# Altium PCB PCB_配电变压器智能监测系统_2022-01-25.pcbdoc (part 1 of 2)
Units mil, origin at the board's own origin, x right, y up, seen from the top; angles counter-clockwise.
Board outline 10255 x 6268.94 mil, 2 copper layers (Top Layer, Bottom Layer); 221 components, 191 nets, 862 pads, 208 vias.
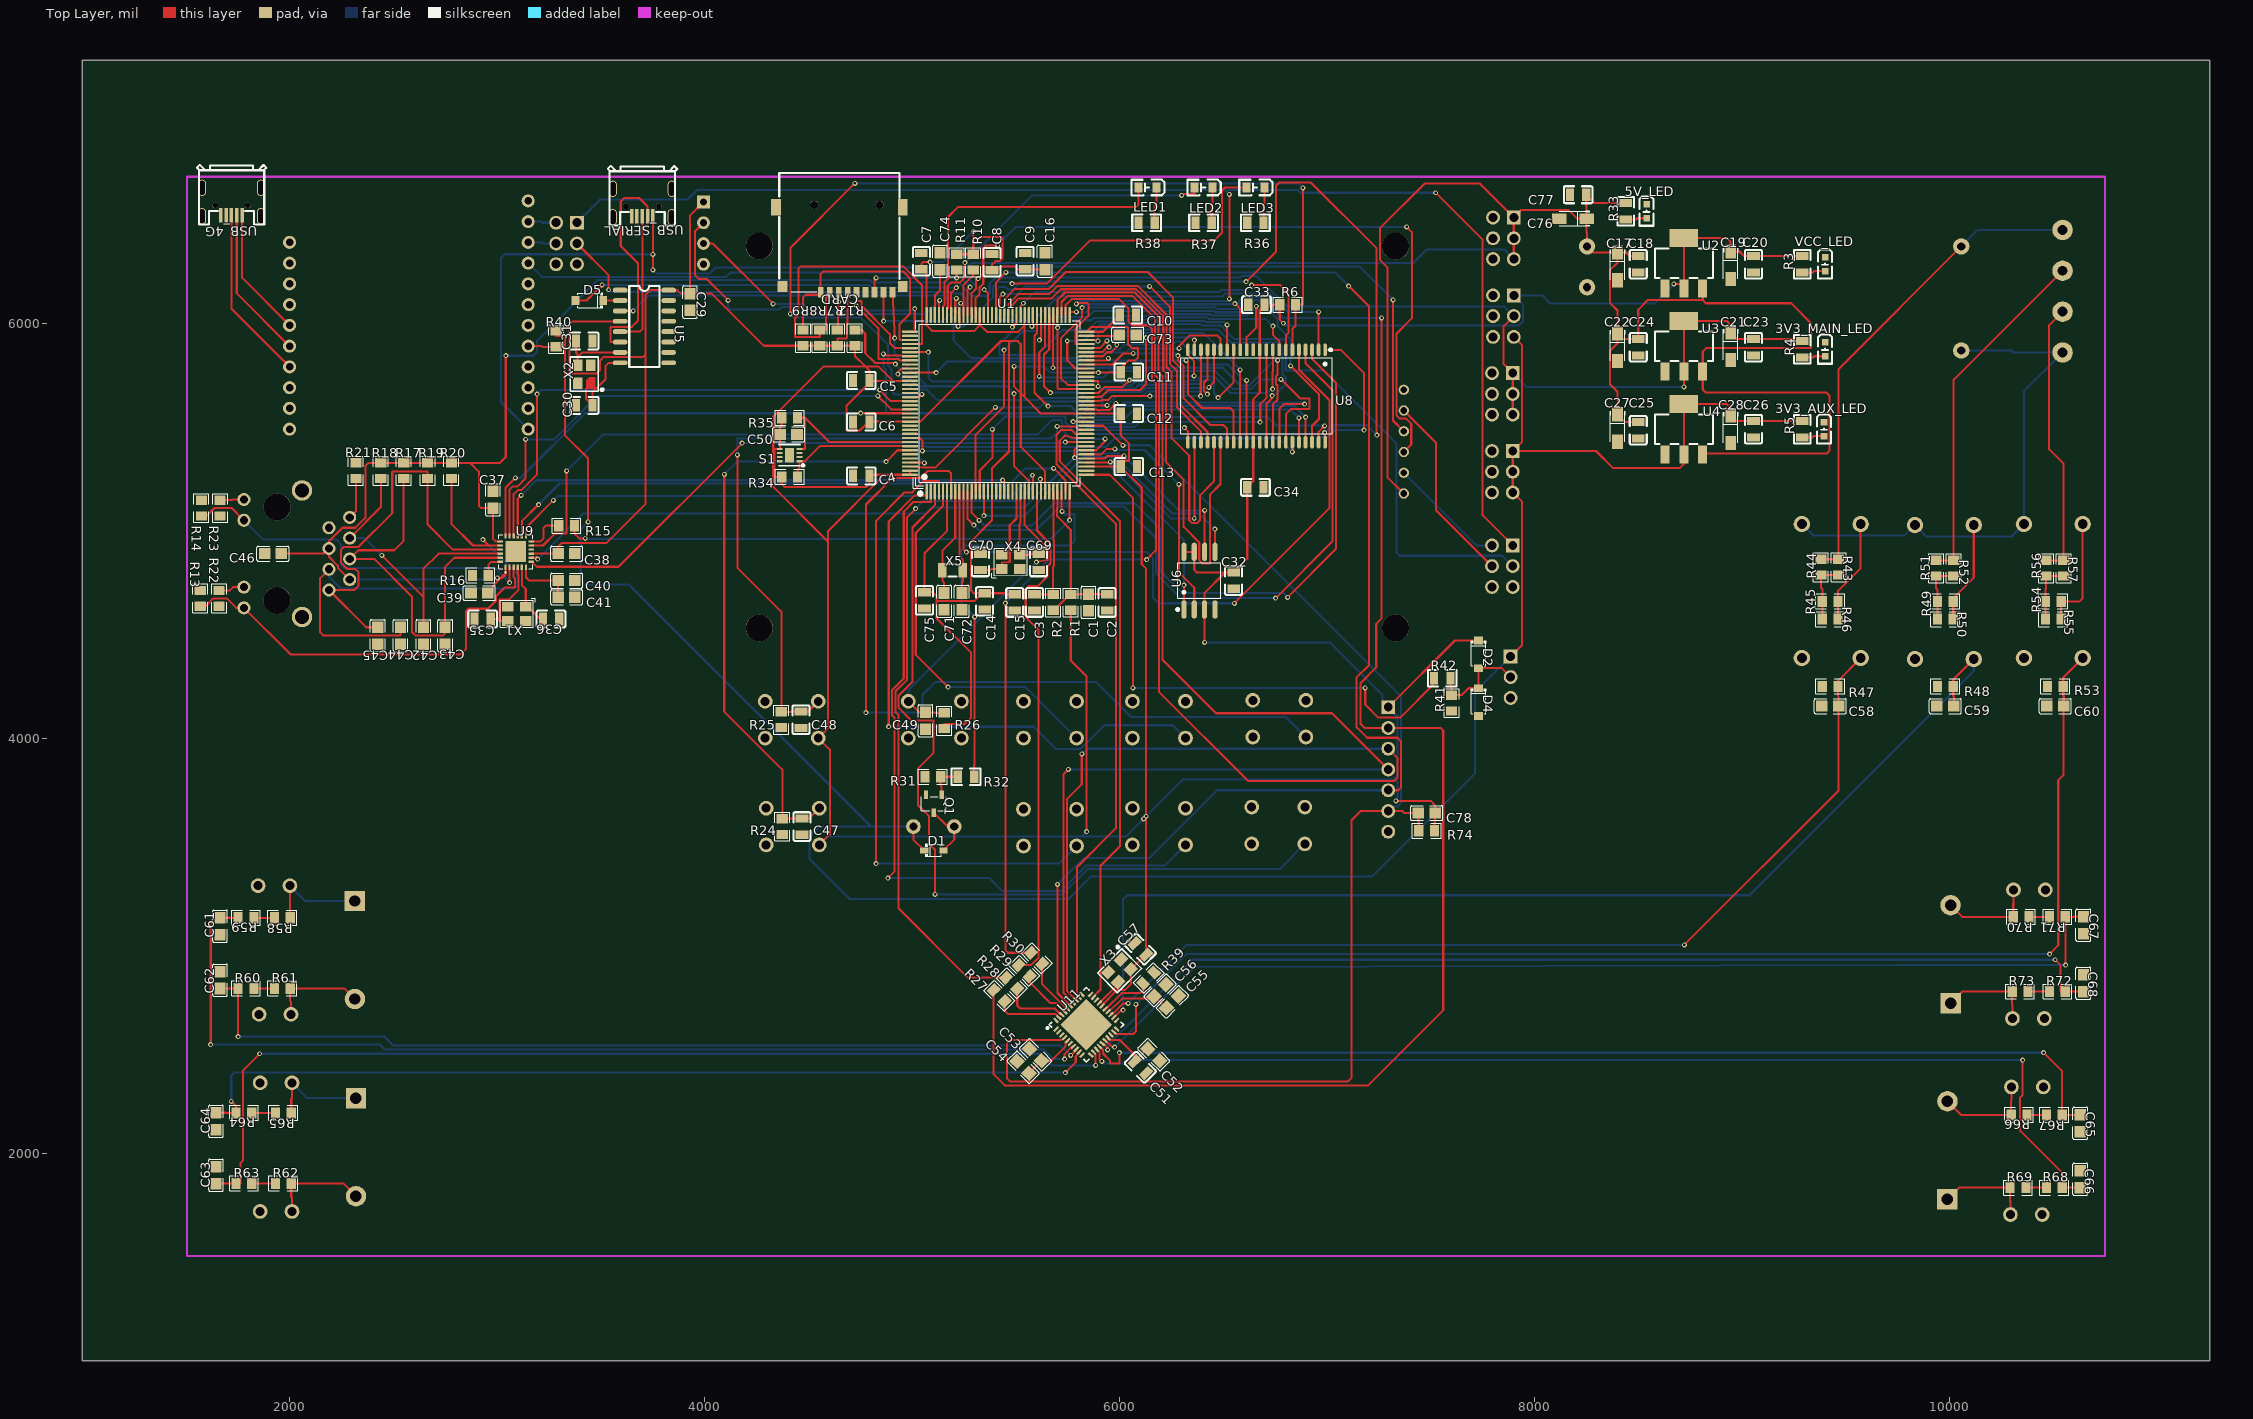
[diagram p0: Top Layer view]
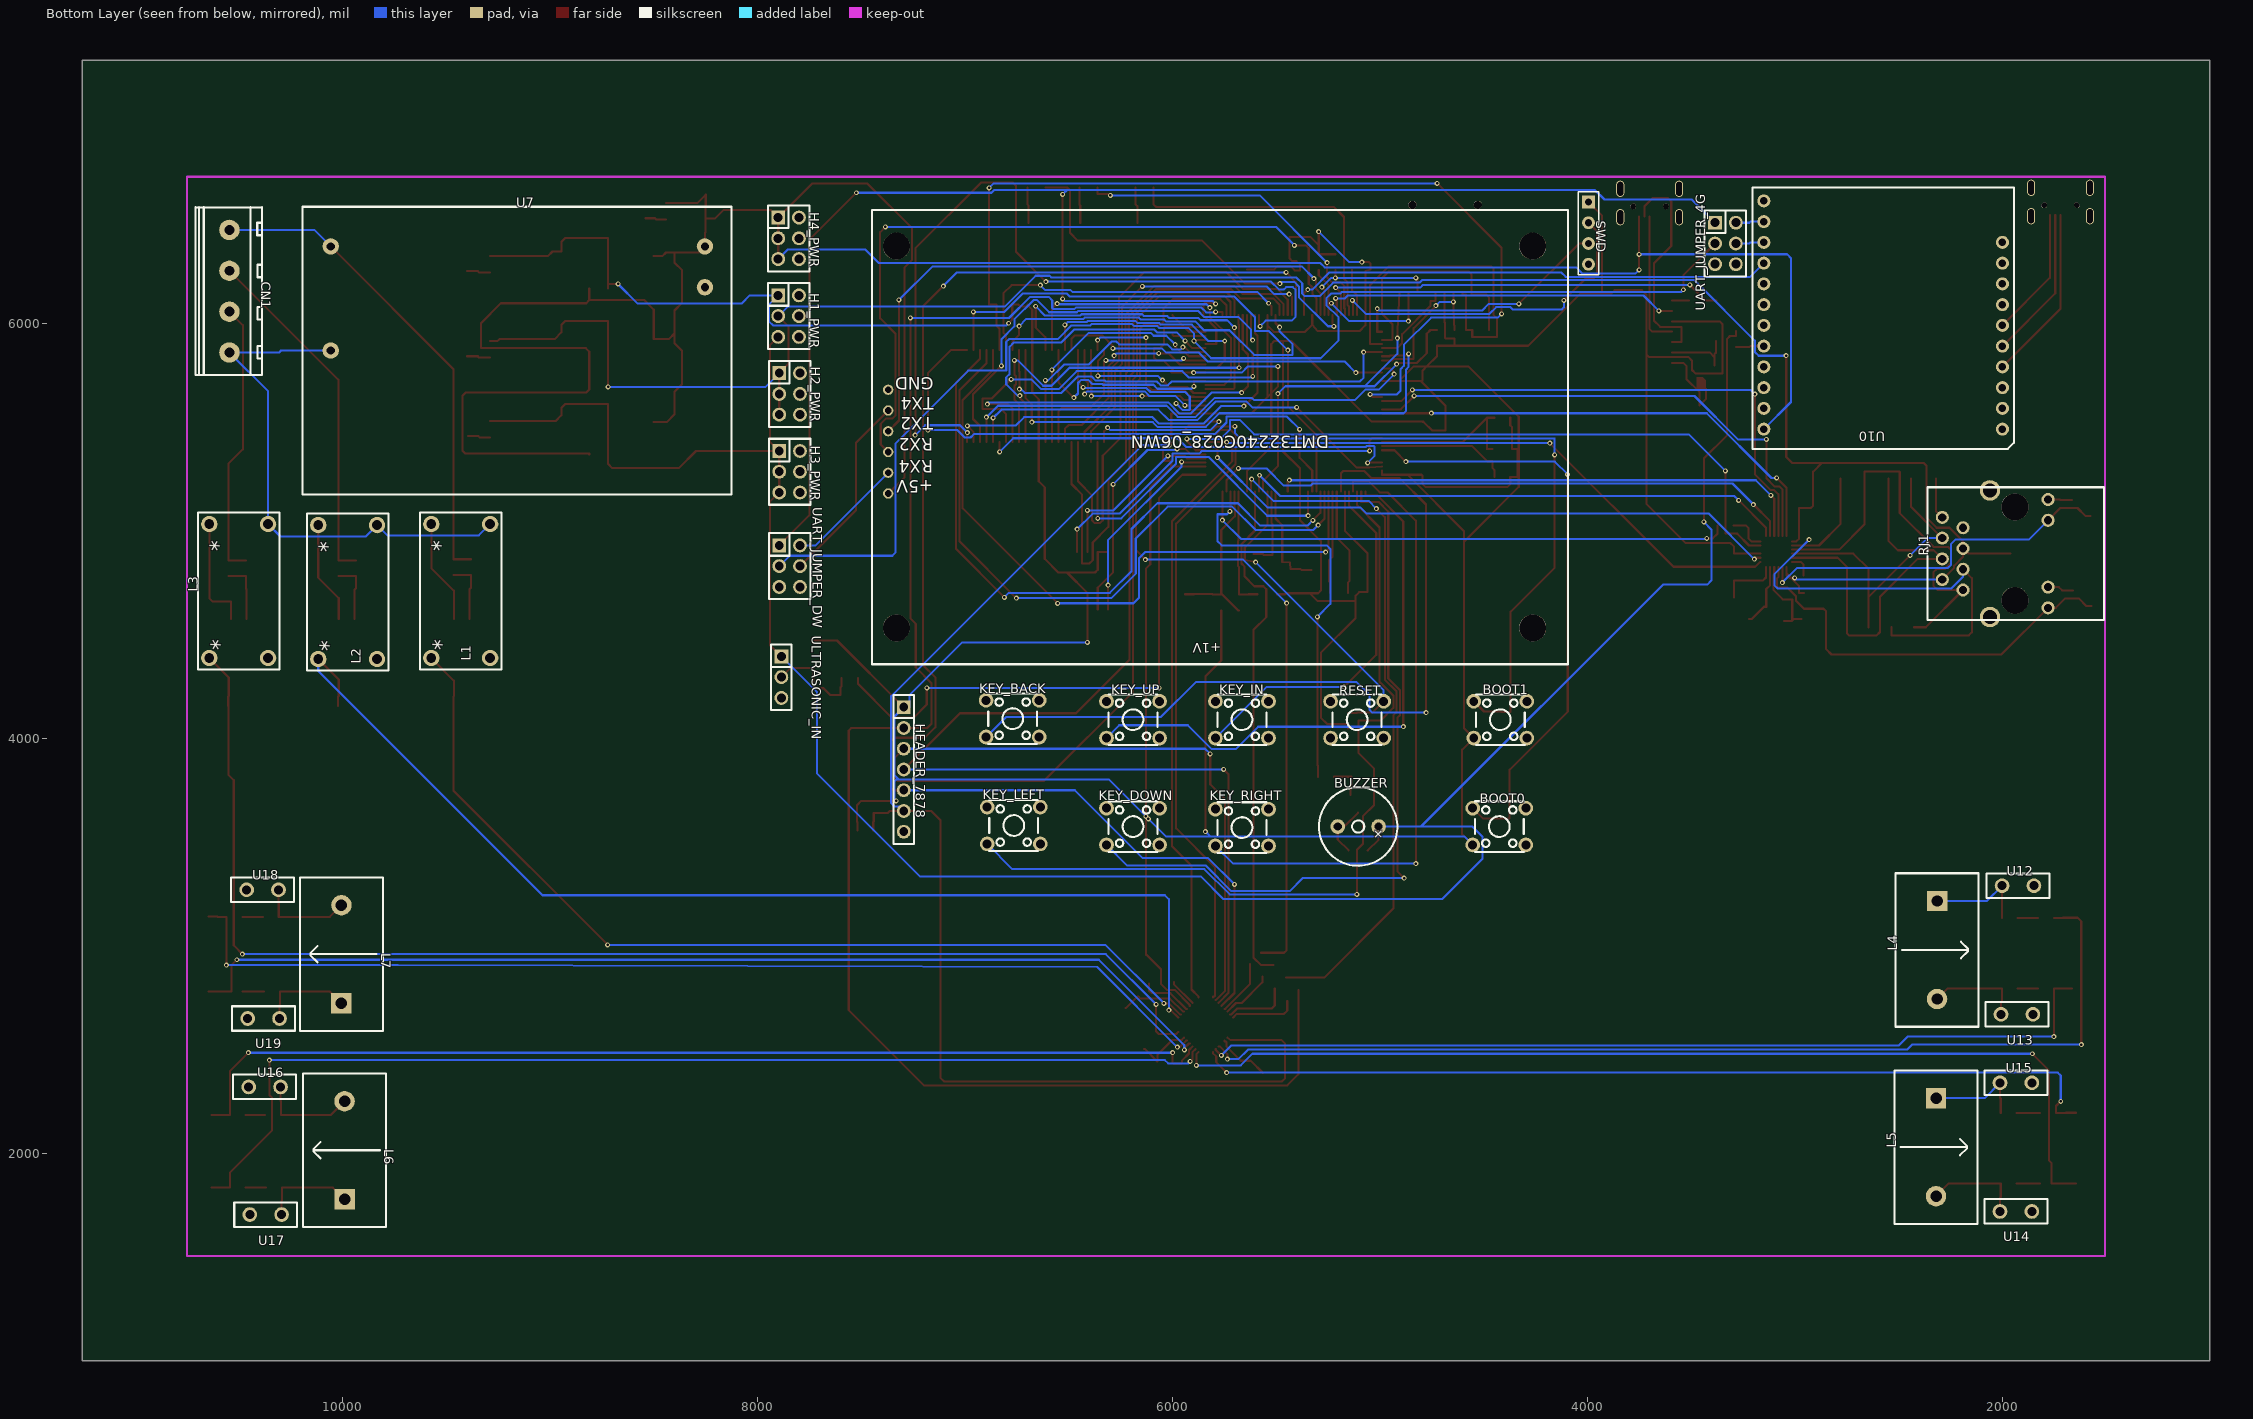
[diagram p1: Bottom Layer view, seen from below]

## Layer stack, top to bottom
Top Solder: solder mask 0.4, Solder Resist, Dk 3.5
Top Layer: signal copper 1.4
Dielectric1: dielectric 12.6, FR-4, Dk 4.8
Bottom Layer: signal copper 1.4
Bottom Solder: solder mask 0.4, Solder Resist, Dk 3.5

## Board outline
11255,1000 1000,1000 1000,7268.94 11255,7268.94

## Design rules (kind name [scope] priority, off if disabled: settings)
Clearance [All] p1: gap=6 ignorepadtopadclearanceinfootprint=FALSE except(0: Arc-Hole Track-Hole SMDPad-Hole THPad-Hole Via-Hole Fill-Hole Poly-Hole Region-Hole Text-Hole)
PolygonConnect [All] p1: connectstyle=Relief reliefconductorwidth=10 reliefentries=4 polygonreliefangle="90 Angle" airgapwidth=10
RoutingVias [All] p1: holewidth=12 width=24 viastyle="Through Hole" minholewidth=12 minwidth=24 maxholewidth=12 maxwidth=24
SolderMaskExpansion [All] p1: expansion=4 istentingtop=FALSE
Width [All] p1: maxlimit=20 minlimit=6 preferedwidth=10
30 further rules are at their usual default settings.

## Components (designator, comment, footprint, x,y, rotation, side; value= is the part's Value field where it differs from the comment)
3V3_AUX_LED "19-217/BHC-ZL1M2RY/3T" LED0603-R-RD 9395,5490 r270 top
3V3_MAIN_LED "19-217/BHC-ZL1M2RY/3T" LED0603-R-RD 9400,5875 r270 top
5V_LED "19-217/BHC-ZL1M2RY/3T" LED0603-R-RD 8540,6540 r270 top
+1V "DMT32240C028_06WN" DMT32240C028_06WN 7370,5680 r180 bottom
BOOT0 "B3F-1025" SW-TH_4P-L6.2-W6.2-P4.50-LS6.5 4425,3575 r0 bottom
BOOT1 "B3F-1025" SW-TH_4P-L6.2-W6.2-P4.50-LS6.5 4420,4090 r0 bottom
BUZZER "HNB09A05" BUZ-TH_BD9.6-P5.00-D0.7-FD 5105,3575 r180 bottom
C1 "10uF" C0805#1 5850,4655 r90 top
C2 "100nF" C0805#2 5940,4655 r90 top
C3 "100nF" C0805#2 5590,4655 r90 top
C4 "100nF" C0805#2 4755,5265 r0 top
C5 "100nF" C0805#2 4755,5725 r0 top
C6 "100nF" C0805#2 4755,5525 r0 top
C7 "100nF" C0805#2 5045,6300 r270 top
C8 "100nF" C0805#2 5385,6295 r270 top
C9 "100nF" C0805#2 5545,6300 r270 top
C10 "100nF" C0805#2 6040,6040 r180 top
C11 "100nF" C0805#2 6045,5765 r180 top
C12 "100nF" C0805#2 6045,5565 r180 top
C13 "100nF" C0805#2 6045,5310 r180 top
C14 "100nF" C0805#2 5350,4660 r90 top
C15 "100nF" C0805#2 5495,4655 r90 top
C16 "4.7uF" C0805#1 5640,6300 r270 top
C17 "10uF" CAP-SMD_L3.2-W1.6-R-RD 8400,6275 r90 top
C18 "100nF" C0805#2 8500,6285 r90 top
C19 "10uF" CAP-SMD_L3.2-W1.6-R-RD 8945,6280 r90 top
C20 "100nF" C0805#2 9055,6285 r90 top
C21 "10uF" CAP-SMD_L3.2-W1.6-R-RD 8945,5890 r90 top
C22 "10uF" CAP-SMD_L3.2-W1.6-R-RD 8400,5885 r90 top
C23 "100nF" C0805#2 9055,5885 r90 top
C24 "100nF" C0805#2 8500,5885 r90 top
C25 "100nF" C0805#2 8500,5485 r90 top
C26 "100nF" C0805#2 9055,5490 r90 top
C27 "10uF" CAP-SMD_L3.2-W1.6-R-RD 8400,5495 r90 top
C28 "10uF" CAP-SMD_L3.2-W1.6-R-RD 8945,5490 r90 top
C29 "100nF" C0805#1 3929.3,6103 r90 top
C30 "22pF" C0805#2 3420,5605 r0 top
C31 "22pF" C0805#2 3420,5915 r180 top
C32 "100nF" C0805#2 6550,4760 r90 top
C33 "100nF" C0805#2 6660,6090 r180 top
C34 "100nF" C0805#2 6655,5210 r180 top
C35 "22pF" C0805#2 2930,4575 r0 top
C36 "22pF" C0805#2 3260,4575 r180 top
C37 "100nF" C0805#1 2980,5150 r90 top
C38 "100nF" C0805#1 3335,4890 r180 top
C39 "100nF" C0805#1 2915,4700 r0 top
C40 "10uF" C0805#1 3335,4760 r180 top
C41 "100nF" C0805#1 3335,4680 r180 top
C42 "10pF" C0805#1 2645,4495 r90 top
C43 "10pF" C0805#1 2750,4495 r90 top
C44 "10pF" C0805#1 2535,4495 r90 top
C45 "10pF" C0805#1 2425,4495 r90 top
C46 "22nF" C0805#1 1920,4890 r0 top
C47 "100nF" C0805#2 4470,3575 r270 top
C48 "100nF" C0805#2 4465,4090 r270 top
C49 "100nF" C0805#1 5065,4085 r270 top
C50 "100nF" C0805#1 4405,5465 r180 top
C51 "100nF" C0805#2 6100,2415 r135 top
C52 "4.7uF" C0805#1 6165,2475 r135 top
C53 "4.7uF" C0805#1 5595,2475 r315 top
C54 "220nF" C0805#1 5535,2415 r315 top
C55 "220nF" C0805#1 6255,2730 r225 top
C56 "4.7uF" C0805#1 6195,2785 r225 top
C57 "100nF" C0805#2 6100,2985 r315 top
C58 "22nF" C0805#1 9425,4155 r0 top
C59 "22nF" C0805#1 9980,4155 r0 top
C60 "22nF" C0805#1 10510,4155 r0 top
C61 "22nF" C0805#1 1665,3095 r90 top
C62 "22nF" C0805#1 1665,2835 r90 top
C63 "22nF" C0805#1 1645,1895 r90 top
C64 "22nF" C0805#1 1645,2155 r90 top
C65 "22nF" C0805#1 10630,2145 r270 top
C66 "22nF" C0805#1 10630,1875 r270 top
C67 "22nF" C0805#1 10645,3100 r270 top
C68 "22nF" C0805#1 10645,2820 r270 top
C69 "22pf" C0805#2 5610,4850 r270 top
C70 "22pf" C0805#2 5330,4850 r90 top
C71 "12pF" C0805#1 5155,4660 r90 top
C72 "12pF" C0805#1 5240,4660 r90 top
C73 "2.2uF" C0805#1 6040,5945 r0 top
C74 "2.2uF" C0805#1 5135,6300 r270 top
C75 "100nF" C0805#2 5060,4665 r90 top
C76 "10uF" CAP-SMD_L3.2-W1.6-R-RD 8185,6505 r0 top
C77 "100nF" C0805#2 8210,6620 r0 top
C78 "1uF" C0805#1 7480,3640 r0 top
CARD "TF-01A" TF-SMD_TF-01A 4650,6355 r180 top
CN1 "WJ127-5.0-4P" CONN-TH_4P-P5.00_WJ127-5.0-4P 10545,6155 r90 bottom
D1 "1N4148WS T4" SOD-323_L1.8-W1.3-LS2.5-RD 5105,3460 r0 top
D2 "1N4148W_C81598" SOD-123_L2.8-W1.8-LS3.7-RD 7730,4405 r270 top
D4 "1N4148W_C81598" SOD-123_L2.8-W1.8-LS3.7-RD 7730,4175 r270 top
D5 "1N4148W_C81598" SOD-123_L2.8-W1.8-LS3.7-RD 3445,6110 r180 top
H1_PWR "X6521WV-2×03H-C30D60" HDR-TH_6P-P2.54-V-M-R2-C3-S2.54 7850,6035 r90 bottom
H2_PWR "X6521WV-2×03H-C30D60" HDR-TH_6P-P2.54-V-M-R2-C3-S2.54 7845,5660 r90 bottom
H3_PWR "X6521WV-2×03H-C30D60" HDR-TH_6P-P2.54-V-M-R2-C3-S2.54 7845,5285 r90 bottom
H4_PWR "X6521WV-2×03H-C30D60" HDR-TH_6P-P2.54-V-M-R2-C3-S2.54 7850,6410 r90 bottom
HEADER_7878 "DZ254R-11-07-63" HDR-TH_7P-P2.54-V-M 7295,3850 r90 bottom
KEY_BACK "B3F-1025" SW-TH_4P-L6.2-W6.2-P4.50-LS6.5 6770,4095 r0 bottom
KEY_DOWN "B3F-1025" SW-TH_4P-L6.2-W6.2-P4.50-LS6.5 6190,3575 r0 bottom
KEY_IN "B3F-1025" SW-TH_4P-L6.2-W6.2-P4.50-LS6.5 5665,4090 r0 bottom
KEY_LEFT "B3F-1025" SW-TH_4P-L6.2-W6.2-P4.50-LS6.5 6765,3580 r0 bottom
KEY_RIGHT "B3F-1025" SW-TH_4P-L6.2-W6.2-P4.50-LS6.5 5665,3570 r0 bottom
KEY_UP "B3F-1025" SW-TH_4P-L6.2-W6.2-P4.50-LS6.5 6190,4090 r0 bottom
L1 "ZMPT107-1" XFMR-TH_ZMPT107-1 9430,4710 r270 bottom
L2 "ZMPT107-1" XFMR-TH_ZMPT107-1 9975,4705 r270 bottom
L3 "ZMPT107-1" XFMR-TH_ZMPT107-1 10500,4710 r270 bottom
L4 "HCT226" HCT226HN 2315,2980 r270 bottom
L5 "HCT226" HCT226HN 2320,2030 r270 bottom
L6 "HCT226" HCT226HN 9990,2015 r90 bottom
L7 "HCT226" HCT226HN 10005,2960 r90 bottom
LED1 "FC-2012HRK-620D" LED0805-RD_RED 6135,6655 r180 top
LED2 "0805G (Green)" LED0805-RD_GREEN 6405,6655 r180 top
LED3 "XL-0805QBC" LED0805-RD 6655,6655 r180 top
Q1 "S8050_C2146" SOT-23-3_L3.0-W1.7-P0.95-LS2.9-BR 5105,3685 r90 top
R1 "10" R0805_NEW 5765,4655 r90 top
R2 "0" R0805#1 5680,4655 r90 top
R3 "1K" R0805#2 9290,6285 r90 top
R4 "1K" R0805#2 9290,5875 r90 top
R5 "1K" R0805#2 9290,5490 r90 top
R6 "10K" R0805#1 6810,6090 r180 top
R7 "47K" R0805#1 4640,5930 r270 top
R8 "47K" R0805#1 4555,5930 r270 top
R9 "47K" R0805#1 4475,5930 r270 top
R10 "47K" R0805#1 5295,6295 r90 top
R11 "47K" R0805#1 5215,6295 r90 top
R12 "47K" R0805#1 4725,5930 r270 top
R13 "10K" R0805#1 1570,4675 r270 top
R14 "10K" R0805#1 1575,5110 r270 top
R15 "510" R0805#1 3335,5025 r180 top
R16 "12.1K" R0805#1 2920,4785 r180 top
R17 "49.9" R0805#1 2550,5290 r90 top
R18 "49.9" R0805#1 2440,5290 r90 top
R19 "49.9" R0805#1 2665,5290 r90 top
R20 "49.9" R0805#1 2780,5290 r90 top
R21 "0" R0805#1 2320,5290 r270 top
R22 "510" R0805#1 1660,4675 r270 top
R23 "510" R0805#1 1665,5110 r270 top
R24 "10K" R0805#1 4375,3575 r90 top
R25 "10K" R0805#1 4370,4090 r90 top
R26 "10K" R0805#1 5155,4085 r90 top
R27 "100" R0805#1 5420,2760 r135 top
R28 "100" R0805#1 5480,2820 r135 top
R29 "100" R0805#1 5540,2880 r135 top
R30 "100" R0805#1 5600,2940 r135 top
R31 "10K" R0805#1 5100,3815 r180 top
R32 "1K" R0805#2 5260,3815 r0 top
R33 "1K" R0805#2 8440,6540 r90 top
R34 "4.7K" R0805#1 4410,5260 r180 top
R35 "4.7K" R0805#1 4410,5545 r0 top
R36 "1K" R0805#2 6655,6485 r0 top
R37 "1K" R0805#2 6405,6485 r0 top
R38 "1K" R0805#2 6130,6485 r0 top
R39 "0" R0805#1 6140,2845 r225 top
R40 "0" R0805#1 3285,5925 r270 top
R41 "10K" R0805#1 7600,4170 r90 top
R42 "1K" R0805#2 7555,4290 r0 top
R43 "200K" R0805#1 9465,4825 r270 top
R44 "200K" R0805#1 9380,4825 r270 top
R45 "200K" R0805#1 9425,4660 r0 top
R46 "200K" R0805#1 9425,4575 r0 top
R47 "120K" R0805#1 9425,4250 r0 top
R48 "120K" R0805#1 9980,4250 r0 top
R49 "200K" R0805#1 9980,4660 r0 top
R50 "200K" R0805#1 9980,4575 r0 top
R51 "200K" R0805#1 9935,4820 r270 top
R52 "200K" R0805#1 10020,4820 r270 top
R53 "120K" R0805#1 10510,4250 r0 top
R54 "200K" R0805#1 10500,4660 r0 top
R55 "200K" R0805#1 10500,4575 r0 top
R56 "200K" R0805#1 10465,4820 r270 top
R57 "200K" R0805#1 10550,4820 r270 top
R58 "100" R0805#1 1965,3135 r180 top
R59 "10K" R0805#1 1790,3135 r180 top
R60 "10K" R0805#1 1790,2795 r180 top
R61 "100" R0805#1 1965,2795 r180 top
R62 "100" R0805#1 1970,1855 r180 top
R63 "10K" R0805#1 1780,1855 r180 top
R64 "10K" R0805#1 1780,2195 r180 top
R65 "100" R0805#1 1970,2195 r180 top
R66 "100" R0805#1 10335,2185 r0 top
R67 "10K" R0805#1 10505,2185 r0 top
R68 "10K" R0805#1 10505,1835 r0 top
R69 "100" R0805#1 10330,1835 r0 top
R70 "100" R0805#1 10345,3140 r0 top
R71 "10K" R0805#1 10520,3140 r0 top
R72 "10K" R0805#1 10520,2780 r0 top
R73 "100" R0805#1 10340,2780 r0 top
R74 "10K" R0805#1 7480,3555 r0 top
RESET "B3F-1025" SW-TH_4P-L6.2-W6.2-P4.50-LS6.5 5110,4090 r0 bottom
RJ1 "13F-611YGDP2NL" RJ45-TH_13F-611YGDP2NL 2035,4890 r270 bottom
S1 "SHT31-DIS-B" DFN-8_L2.5-W2.5-P0.50-BL-EP 4410,5365 r90 top
SWD "HDR-F-2.54_1x4" HDR-F-2.54_1X4 3995,6435 r90 bottom
U1 "STM32F407ZET6" LQFP-144_L20.0-W20.0-P0.50-LS22.0-BL 5415,5615 r0 top
U2 "AMS1117-3.3" SOT-223-3_L6.5-W3.4-P2.30-LS7.0-BR 8720,6290 r270 top
U3 "AMS1117-3.3" SOT-223-3_L6.5-W3.4-P2.30-LS7.0-BR 8720,5890 r270 top
U4 "AMS1117-3.3" SOT-223-3_L6.5-W3.4-P2.30-LS7.0-BR 8720,5490 r270 top
U5 "CH340G" SOIC-16_L9.9-W3.9-P1.27-LS6.0-BL 3710,5985 r270 top
U6 "W25Q128JVSIQTR" SOIC-8_L5.3-W5.3-P1.27-LS8.0-BL 6385,4760 r0 top
U7 "AM21-20W05V" AM21-24W24V 9155,6120 r0 bottom
U8 "IS62WV51216BLL-55TLI" TSOP-44_L18.4-W10.2-P0.80-LS11.8-BL 6660,5650 r180 top
U9 "LAN8720A-CP-TR" QFN-24_L4.0-W4.0-P0.50-BL-EP2.6 3090,4900 r0 top
U10 "YED-C724-AIR724UG" YED-C724 1945,5430 r180 bottom
U11 "ADE7878ACPZ-RL" LFCSP-40_L6.0-W6.0-P0.50-TL-EP4.3 5840,2620 r45 top
U12 "RJ711_5Ω" RJ711 1925,3290 r0 bottom
U13 "RJ711_5Ω" RJ711 1930,2670 r180 bottom
U14 "RJ711_5Ω" RJ711 1935,1720 r180 bottom
U15 "RJ711_5Ω" RJ711 1935,2340 r0 bottom
U16 "RJ711_5Ω" RJ711 10375,2320 r0 bottom
U17 "RJ711_5Ω" RJ711 10370,1705 r180 bottom
U18 "RJ711_5Ω" RJ711 10385,3270 r0 bottom
U19 "RJ711_5Ω" RJ711 10380,2650 r180 bottom
UART_JUMPER_4G "X6521WV-2×03H-C30D60" HDR-TH_6P-P2.54-V-M-R2-C3-S2.54 3335,6385 r90 bottom
UART_JUMPER_DW "X6521WV-2×03H-C30D60" HDR-TH_6P-P2.54-V-M-R2-C3-S2.54 7845,4830 r90 bottom
ULTRASONIC_IN "DZ254R-11-03-63" HDR-TH_3P-P2.54-V-M 7885,4295 r90 bottom
USB_4G "U-F-M5DD-Y-1" MICRO-USB-SMD_U-F-M5DD-Y-1 1720,6585 r90 top
USB_SERIAL "U-F-M5DD-Y-1" MICRO-USB-SMD_U-F-M5DD-Y-1 3700,6580 r90 top
VCC_LED "19-217/BHC-ZL1M2RY/3T" LED0603-R-RD 9400,6285 r270 top
X1 "25MHz" OSC-SMD_4P-L3.2-W2.5-BL#1 3095,4600 r180 top
X2 "12MHz" OSC-SMD_4P-L3.2-W2.5-BL#2 3420,5755 r90 top
X3 "16.384MHz" OSC-SMD_4P-L3.2-W2.5-BL_SIT8008BI 6000,2880 r225 top
X4 "16MHz" OSC-SMD_4P-L3.2-W2.5-BL#1 5475,4850 r0 top
X5 "32.768KHz" FC-135R_L3.2-W1.5 5195,4810 r180 top

## Footprints (in the part's own frame and the unit in brackets; to place one, negate y for a bottom-side part, rotate by r counter-clockwise, add the part's x,y. Pads: shape width x height; smd on the part's side, far side on the other; paste and mask are expansions set on the pad)
AM21-24W24V [mm]
  round 2 hole 1: 1(22.9,-6.375) 2(22.9,6.375) 3(-22.9,-1.375) 4(-22.9,-6.375)
  silkscreen extent -26.15,-11.23 26.35,23.97
BUZ-TH_BD9.6-P5.00-D0.7-FD [mm]
  round 1.8 hole 1: 1(2.5,0) 2(-2.5,0)
  silkscreen extent -4.8,-4.8 4.8,4.8
C0805#1 [mm]
  rect 1.41x1.35 smd: 1(-1.03,0) 2(1.03,0)
  silkscreen extent -1.96,-0.9 1.96,0.9
C0805#2 [mm]
  rect 1x1.55 smd: 1(-1,0) 2(1,0)
  silkscreen extent -1.75,-1.04 1.75,1.04
CAP-SMD_L3.2-W1.6-R-RD [mil]
  rect 69.19x51.02 smd: 1(66.39,0) 2(-66.39,0)
  silkscreen extent -66,-37 81,37
CONN-TH_4P-P5.00_WJ127-5.0-4P [mm]
  round 2.5 hole 1.2: 1(7.5,0) 2(2.5,0) 3(-2.5,0) 4(-7.5,0)
  silkscreen extent -10.28,-4 10.28,4.16
DFN-8_L2.5-W2.5-P0.50-BL-EP [mm]
  rect 0.25x0.7 smd: 1(-0.75,-1.2) 2(-0.25,-1.2) 3(0.25,-1.2) 4(0.75,-1.2) 5(0.75,1.2) 6(0.25,1.2) 7(-0.25,1.2) 8(-0.75,1.2)
  rect 1.8x1.1 smd: 9(0,0)
  silkscreen extent -1.39,-1.77 1.3,1.3
DMT32240C028_06WN [mm]
  round 1.26 hole 0.84: 1(0,-12.7) 2(0,-10.16) 3(0,-7.62) 4(0,-5.08) 5(0,-2.54) 6(0,0)
  round 3.3 hole 3.3 unplated: ""(1,-29.15) ""(1,17.575) ""(78.9,-29.15) ""(78.9,17.575)
  silkscreen extent -2,-33.6 83.2,22
FC-135R_L3.2-W1.5 [mm]
  rect 1x1.8 smd: 1(-1.25,0) 2(1.25,0)
  silkscreen extent -0.51,-0.76 0.51,0.76
HCT226HN [mm]
  round 2.5 hole 1.4: 1(6,0)
  rect 2.5x2.5 hole 1.4: 2(-6,0)
  silkscreen extent -9.4,-5.08 9.4,5.08
HDR-F-2.54_1X4 [mil]
  rect 62x62 hole 35: 1(150,0)
  round 62 hole 35: 2(50,0) 3(-50,0) 4(-150,0)
  silkscreen extent -200,-50 200,50
HDR-TH_3P-P2.54-V-M [mm]
  rect 1.7x1.7 hole 1.1: 1(2.54,0)
  round 1.7 hole 1.1: 2(0,0) 3(-2.54,0)
  silkscreen extent -4.02,-1.27 4.02,1.27
HDR-TH_6P-P2.54-V-M-R2-C3-S2.54 [mm]
  rect 1.7x1.7 hole 1.1: 1(2.54,1.27)
  round 1.7 hole 1.1: 2(2.54,-1.27) 3(0,1.27) 4(0,-1.27) 5(-2.54,1.27) 6(-2.54,-1.27)
  silkscreen extent -4.04,-2.54 4.04,2.54
HDR-TH_7P-P2.54-V-M [mm]
  rect 1.7x1.7 hole 1.1: 1(7.62,0)
  round 1.7 hole 1.1: 2(5.08,0) 3(2.54,0) 4(0,0) 5(-2.54,0) 6(-5.08,0) 7(-7.62,0)
  silkscreen extent -9.1,-1.27 9.1,1.27
LED0603-R-RD [mm]
  rect 0.8x0.8 smd: 1(0.851,0) 2(-0.851,0)
  silkscreen extent -1.82,-0.86 1.77,0.86
LED0805-RD [mm]
  rect 1x1.25 smd: 1(-1.1,0) 2(1.1,0)
  silkscreen extent -2.1,-0.95 1.98,0.96
LED0805-RD_GREEN [mm]
  rect 1x1.25 smd: 1(-1.1,0) 2(1.1,0)
  silkscreen extent -2.1,-0.95 1.98,0.96
LED0805-RD_RED [mm]
  rect 1x1.25 smd: 1(-1.1,0) 2(1.1,0)
  silkscreen extent -2.1,-0.95 1.98,0.96
LFCSP-40_L6.0-W6.0-P0.50-TL-EP4.3 [mm]
  rect 0.8x0.28 smd: 1(-3,2.25) 2(-3,1.75) 3(-3,1.25) 4(-3,0.75) 5(-3,0.25) 6(-3,-0.25) 7(-3,-0.75) 8(-3,-1.25) 9(-3,-1.75) 10(-3,-2.25) 21(3,-2.25) 22(3,-1.75) 23(3,-1.25) 24(3,-0.75) 25(3,-0.25) 26(3,0.25) 27(3,0.75) 28(3,1.25) 29(3,1.75) 30(3,2.25)
  rect 0.3x0.8 smd: 11(-2.25,-3) 12(-1.75,-3) 13(-1.25,-3) 14(-0.75,-3) 15(-0.25,-3) 16(0.25,-3) 17(0.75,-3) 18(1.25,-3) 19(1.75,-3) 20(2.25,-3) 31(2.25,3) 32(1.75,3) 33(1.25,3) 34(0.75,3) 35(0.25,3) 36(-0.25,3) 37(-0.75,3) 38(-1.25,3) 39(-1.75,3) 40(-2.25,3)
  rect 4.5x4.5 smd: 41(0,0)
  silkscreen extent -3.8,-3.23 3.23,3.23
LQFP-144_L20.0-W20.0-P0.50-LS22.0-BL [mm]
  oval 0.28x2 smd: 1(-8.75,-10.8) 2(-8.25,-10.8) 3(-7.75,-10.8) 4(-7.25,-10.8) 5(-6.75,-10.8) 6(-6.25,-10.8) 7(-5.75,-10.8) 8(-5.25,-10.8) 9(-4.75,-10.8) 10(-4.25,-10.8) 11(-3.75,-10.8) 12(-3.25,-10.8) 13(-2.75,-10.8) 14(-2.25,-10.8) 15(-1.75,-10.8) 16(-1.25,-10.8) 17(-0.75,-10.8) 18(-0.25,-10.8) 19(0.25,-10.8) 20(0.75,-10.8) 21(1.25,-10.8) 22(1.75,-10.8) 23(2.25,-10.8) 24(2.75,-10.8) 25(3.25,-10.8) 26(3.75,-10.8) 27(4.25,-10.8) 28(4.75,-10.8) 29(5.25,-10.8) 30(5.75,-10.8) 31(6.25,-10.8) 32(6.75,-10.8) 33(7.25,-10.8) 34(7.75,-10.8) 35(8.25,-10.8) 36(8.75,-10.8) 73(8.75,10.8) 74(8.25,10.8) 75(7.75,10.8) 76(7.25,10.8) 77(6.75,10.8) 78(6.25,10.8) 79(5.75,10.8) 80(5.25,10.8) 81(4.75,10.8) 82(4.25,10.8) 83(3.75,10.8) 84(3.25,10.8) 85(2.75,10.8) 86(2.25,10.8) 87(1.75,10.8) 88(1.25,10.8) 89(0.75,10.8) 90(0.25,10.8) 91(-0.25,10.8) 92(-0.75,10.8) 93(-1.25,10.8) 94(-1.75,10.8) 95(-2.25,10.8) 96(-2.75,10.8) 97(-3.25,10.8) 98(-3.75,10.8) 99(-4.25,10.8) 100(-4.75,10.8) 101(-5.25,10.8) 102(-5.75,10.8) 103(-6.25,10.8) 104(-6.75,10.8) 105(-7.25,10.8) 106(-7.75,10.8) 107(-8.25,10.8) 108(-8.75,10.8)
  oval 2x0.28 smd: 37(10.8,-8.75) 38(10.8,-8.25) 39(10.8,-7.75) 40(10.8,-7.25) 41(10.8,-6.75) 42(10.8,-6.25) 43(10.8,-5.75) 44(10.8,-5.25) 45(10.8,-4.75) 46(10.8,-4.25) 47(10.8,-3.75) 48(10.8,-3.25) 49(10.8,-2.75) 50(10.8,-2.25) 51(10.8,-1.75) 52(10.8,-1.25) 53(10.8,-0.75) 54(10.8,-0.25) 55(10.8,0.25) 56(10.8,0.75) 57(10.8,1.25) 58(10.8,1.75) 59(10.8,2.25) 60(10.8,2.75) 61(10.8,3.25) 62(10.8,3.75) 63(10.8,4.25) 64(10.8,4.75) 65(10.8,5.25) 66(10.8,5.75) 67(10.8,6.25) 68(10.8,6.75) 69(10.8,7.25) 70(10.8,7.75) 71(10.8,8.25) 72(10.8,8.75) 109(-10.8,8.75) 110(-10.8,8.25) 111(-10.8,7.75) 112(-10.8,7.25) 113(-10.8,6.75) 114(-10.8,6.25) 115(-10.8,5.75) 116(-10.8,5.25) 117(-10.8,4.75) 118(-10.8,4.25) 119(-10.8,3.75) 120(-10.8,3.25) 121(-10.8,2.75) 122(-10.8,2.25) 123(-10.8,1.75) 124(-10.8,1.25) 125(-10.8,0.75) 126(-10.8,0.25) 127(-10.8,-0.25) 128(-10.8,-0.75) 129(-10.8,-1.25) 130(-10.8,-1.75) 131(-10.8,-2.25) 132(-10.8,-2.75) 133(-10.8,-3.25) 134(-10.8,-3.75) 135(-10.8,-4.25) 136(-10.8,-4.75) 137(-10.8,-5.25) 138(-10.8,-5.75) 139(-10.8,-6.25) 140(-10.8,-6.75) 141(-10.8,-7.25) 142(-10.8,-7.75) 143(-10.8,-8.25) 144(-10.8,-8.75)
  silkscreen extent -10.41,-11.25 10.08,10.08
MICRO-USB-SMD_U-F-M5DD-Y-1 [mm]
  rect 1.8x0.43 smd: 1(-1.626,-1.3) 2(-1.626,-0.65) 3(-1.626,0) 4(-1.626,0.65) 5(-1.626,1.3)
  oval 2x1 hole 0.7 slot 1.7 at 0 deg: 6(-1.735,3.599) 7(1.735,3.6) 8(-1.735,-3.599) 9(1.735,-3.6)
  round 0.7 hole 0.7 unplated: ""(-0.415,2) ""(-0.415,-2)
  silkscreen extent -2.77,-4.28 4.55,4.22
OSC-SMD_4P-L3.2-W2.5-BL#1 [mm]
  rect 1.4x1.2 smd: 1(-1.1,-0.875) 2(1.1,-0.875) 3(1.1,0.875) 4(-1.1,0.875)
  silkscreen extent -2.29,-1.9 2.03,1.65
OSC-SMD_4P-L3.2-W2.5-BL#2 [mm]
  rect 1.4x1.15 smd: 2(1.1,-0.8) 3(1.1,0.8) 4(-1.1,0.8)
  Top Layer region: -1.8,-0.225 -0.762,-0.225 -0.4,-0.604 -0.4,-1.375 -1.8,-1.375
  silkscreen extent -2.1,-2.35 2.1,1.7
OSC-SMD_4P-L3.2-W2.5-BL_SIT8008BI [mm]
  rect 1.4x1.2 smd: 1(-1.1,-0.85) 2(1.1,-0.85) 3(1.1,0.85) 4(-1.1,0.85)
  silkscreen extent -2.1,-2.35 2.1,1.7
QFN-24_L4.0-W4.0-P0.50-BL-EP2.6 [mm]
  rect 0.28x0.665 smd: 1(-1.25,-1.907) 2(-0.75,-1.907) 3(-0.25,-1.907) 4(0.25,-1.907) 5(0.75,-1.907) 6(1.25,-1.907) 13(1.25,1.907) 14(0.75,1.907) 15(0.25,1.907) 16(-0.25,1.907) 17(-0.75,1.907) 18(-1.25,1.907)
  rect 0.665x0.28 smd: 7(1.907,-1.25) 8(1.907,-0.75) 9(1.907,-0.25) 10(1.907,0.25) 11(1.907,0.75) 12(1.907,1.25) 19(-1.907,1.25) 20(-1.907,0.75) 21(-1.907,0.25) 22(-1.907,-0.25) 23(-1.907,-0.75) 24(-1.907,-1.25)
  rect 2.55x2.55 smd: 25(0,0)
  silkscreen extent -2.08,-2.61 2.08,2.08
R0805#1 [mil]
  rect 44.59x54.21 smd: 1(-38.04,0) 2(38.04,0)
  silkscreen extent -69,-36 69,36
R0805#2 [mil]
  rect 39.37x61.02 smd: 1(-39.37,0) 2(39.37,0)
  silkscreen extent -69,-40 69,40
R0805_NEW [mil]
  rect 44.59x54.21 smd: 1(-38.04,0) 2(38.04,0)
  silkscreen extent -69,-36 69,36
RJ45-TH_13F-611YGDP2NL [mm]
  round 1.6 hole 1: 1(4.445,-3.936) 2(3.172,-6.474) 3(1.905,-3.936) 4(0.632,-6.474) 5(-0.635,-3.936) 6(-1.908,-6.474) 7(-3.175,-3.936) 8(-4.448,-6.474) 9(6.629,6.474) 10(4.089,6.474) 11(-4.089,6.474) 12(-6.629,6.474)
  round 2.5 hole 1.7: 13(7.75,-0.637) 14(-7.75,-0.637)
  round 3.3 hole 3.3 unplated: ""(-5.72,2.414) ""(5.71,2.414)
  silkscreen extent -8.13,-8.28 8.13,13.31
RJ711 [mm]
  round 1.8 hole 1.1: 1(-1.95,0) 2(1.95,0)
  silkscreen extent -3.85,-1.5 3.85,1.5
SOD-123_L2.8-W1.8-LS3.7-RD [mm]
  rect 0.95x1.15 smd: 1(-1.693,0) 2(1.693,0)
  silkscreen extent -1.63,-0.94 1.41,0.94
SOD-323_L1.8-W1.3-LS2.5-RD [mm]
  rect 1x0.75 smd: 1(-1.173,0) 2(1.173,0)
  silkscreen extent -1.08,-0.8 0.9,0.8
SOIC-8_L5.3-W5.3-P1.27-LS8.0-BL [mm]
  oval 0.63x2.25 smd: 1(-1.905,-3.53) 2(-0.635,-3.53) 3(0.635,-3.53) 4(1.905,-3.53) 5(1.905,3.53) 6(0.635,3.53) 7(-0.635,3.53) 8(-1.905,3.53)
  silkscreen extent -2.82,-3.68 2.64,2.18
SOIC-16_L9.9-W3.9-P1.27-LS6.0-BL [mm]
  oval 0.6x1.8 smd: 1(-4.445,-2.972) 2(-3.175,-2.972) 3(-1.905,-2.972) 4(-0.635,-2.972) 5(0.635,-2.972) 6(1.905,-2.972) 7(3.175,-2.972) 8(4.445,-2.972) 9(4.445,2.972) 10(3.175,2.972) 11(1.905,2.972) 12(0.635,2.972) 13(-0.635,2.972) 14(-1.905,2.972) 15(-3.175,2.972) 16(-4.445,2.972)
  silkscreen extent -4.98,-1.85 4.98,1.83
SOT-23-3_L3.0-W1.7-P0.95-LS2.9-BR [mm]
  rect 1.037x0.532 smd: 1(1.101,-0.95) 2(1.101,0.95) 3(-1.101,0)
  silkscreen extent -0.86,-1.53 0.86,1.53
SOT-223-3_L6.5-W3.4-P2.30-LS7.0-BR [mm]
  rect 2.2x1.1 smd: 1(3.099,-2.3) 2(3.099,0) 3(3.099,2.3)
  rect 2.2x3.5 smd: 4(-3.099,0)
  silkscreen extent -1.8,-3.55 1.8,3.55
SW-TH_4P-L6.2-W6.2-P4.50-LS6.5 [mm]
  round 1.8 hole 1.1: 1(3.25,-2.25) 2(-3.25,-2.25) 3(3.25,2.25) 4(-3.25,2.25)
  silkscreen extent -2.99,-3.1 3,3.1
TF-SMD_TF-01A [mm]
  rect 0.7x1.3 smd: 1(2.292,5.2) 2(1.192,5.198) 3(0.096,5.2) 4(-1.004,5.2) 5(-2.103,5.2) 6(-3.201,5.2) 7(-4.297,5.2) 8(-5.395,5.2) 9(-6.499,5.2)
  rect 1.2x1.397 smd: 10(-7.747,4.502) 13(6.985,4.502)
  rect 1.2x2 smd: 11(-7.747,-5.2) 12(7.747,-5.2)
  round 1 hole 1 unplated: ""(-4.915,-5.49) ""(3.084,-5.487)
  silkscreen extent -7.37,-9.4 7.37,5.14
TSOP-44_L18.4-W10.2-P0.80-LS11.8-BL [mm]
  oval 0.448x1.551 smd: 1(-8.4,-5.656) 2(-7.6,-5.656) 3(-6.8,-5.656) 4(-6,-5.656) 5(-5.2,-5.656) 6(-4.4,-5.656) 7(-3.6,-5.656) 8(-2.8,-5.656) 9(-2,-5.656) 10(-1.2,-5.656) 11(-0.4,-5.656) 12(0.4,-5.656) 13(1.2,-5.656) 14(2,-5.656) 15(2.8,-5.656) 16(3.6,-5.656) 17(4.4,-5.656) 18(5.2,-5.656) 19(6,-5.656) 20(6.8,-5.656) 21(7.6,-5.656) 22(8.4,-5.656) 23(8.4,5.655) 24(7.6,5.655) 25(6.8,5.655) 26(6,5.655) 27(5.2,5.655) 28(4.4,5.655) 29(3.6,5.655) 30(2.8,5.655) 31(2,5.655) 32(1.2,5.655) 33(0.4,5.655) 34(-0.4,5.655) 35(-1.2,5.655) 36(-2,5.655) 37(-2.8,5.655) 38(-3.6,5.655) 39(-4.4,5.655) 40(-5.2,5.655) 41(-6,5.655) 42(-6.8,5.655) 43(-7.6,5.655) 44(-8.4,5.655)
  silkscreen extent -9.28,-5.81 9.28,4.65
XFMR-TH_ZMPT107-1 [mm]
  round 2 hole 1.2: 1(8.199,-3.599) 2(8.199,3.599) 3(-8.199,-3.599) 4(-8.199,3.599)
  silkscreen extent -9.6,-5 9.6,5
YED-C724 [mm]
  round 1.6 hole 0.914: 1(-1.395,1.532) 2(-1.395,4.072) 3(-1.395,6.612) 4(-1.395,9.152) 5(-1.395,11.692) 6(-1.395,14.232) 7(-1.395,16.772) 8(-1.395,19.312) 9(-1.395,21.852) 10(-1.395,24.392) 11(-30.605,29.472) 12(-30.605,26.932) 13(-30.605,24.392) 14(-30.605,21.852) 15(-30.605,19.312) 16(-30.605,16.772) 17(-30.605,14.232) 18(-30.605,11.692) 19(-30.605,9.152) 20(-30.605,6.612) 21(-30.605,4.072) 22(-30.605,1.532)
  silkscreen extent -32,-0.89 0,31.11

## Via types
v1: diameter 24, hole 12, Top Layer to Bottom Layer, 208 vias

## Nets (pads, with @x,y where several pads share a name; then routed paths per layer and width w, separated by ;. In a path a pad name is that pad's centre, name@x,y a point inside that pad or via, vN(x,y) a via of type N, cw(c..) or ccw(c..) an arc to the next point about the centre after c; other vN are vias at no path point)
3V3_AUX: BUZZER.1 C26.2 C28.1 D1.1 H1_PWR.5 H3_PWR.1 H3_PWR.3 H3_PWR.5 R5.2 R40.1 U4.2 U4.4 ULTRASONIC_IN.1 | length 11523.7
  Top Layer w10: R40.1@3285,5963.04 3285,5940 3286,5939 3313,5939 3327,5925 3327,5461 3439,5349 v1(3439,5043) ; BUZZER.1@5006.57,3575 5006.57,3512.26 D1.1@5058.84,3460 ; ULTRASONIC_IN.1@7885,4395 7940,4450 7940,5140 H3_PWR.5@7895,5185 H3_PWR.3@7895,5285 H3_PWR.1@7895,5385 ; H1_PWR.5@7900,5935 7940,5895 7940,5430 H3_PWR.1@7895,5385 ; R5.2@9290,5529.37 C26.2@9055,5529.37 8972.02,5529.37 C28.1@8945,5556.39 8945,5592 8925,5612 U4.4@8720,5612 U4.2@8720,5368 8720,5322 8700,5302 8379,5302 8296,5385 H3_PWR.1@7895,5385
  Bottom Layer w10: v1(3439,5043) 3402,5006 3402,4762.5 3423.5,4741 3636,4741 4802,3575 ; BUZZER.1@5006.57,3575 4802,3575 ; ULTRASONIC_IN.1@7885,4395 7714,4224 7714,3832 7217,3335 5864,3335 5754,3225 4701,3225 4506,3420 4506,3525 4556,3575 4802,3575
3V3_ETH: C21.1 C23.2 C37.1 C39.2 C46.2 H1_PWR.3 H2_PWR.1 H2_PWR.3 H2_PWR.5 R4.2 R17.2 R18.2 R19.2 R20.2 RJ1.2 RJ1.5 U3.2 U3.4 U9.1 U9.19 | length 11084.4
  Top Layer w10: C46.2@1960.55,4890 2164.97,4890 RJ1.5@2189.97,4915 ; RJ1.2@2289.87,4765.1 2232.47,4822.5 2232.47,4832.6 2189.97,4875.1 RJ1.5@2189.97,4915 ; C39.2@2955.55,4700 2981,4700 2981,4734.93 3019.22,4773.15 ; v1(3001.67,4773.15) 3019.22,4773.15 ; U9.19@3014.9,4949.21 2993.29,4949.21 2980,4962.5 C37.1@2980,5109.45 2925,5109.45 2912.5,5121.95 2912.5,5285 2869.46,5328.04 ; U9.1@3040.79,4824.9 3040.79,4794.72 ; v1(3042,5844) 3042,5356.04 3014,5328.04 2869.46,5328.04 ; H2_PWR.5@7895,5560 H2_PWR.3@7895,5660 H2_PWR.1@7895,5760 7851,5804 7851,5986 H1_PWR.3@7900,6035 ; v1(8720,5694) U3.2@8720,5768 U3.4@8720,6012 8925,6012 8945,5992 C21.1@8945,5956.39 8977.02,5924.37 C23.2@9055,5924.37 9243.18,5924.37 9253.18,5914.37 R4.2@9290,5914.37 ; RJ1.5@2189.97,4915 2189.97,4949.97 2255,5015 2317,5015 2365,5063 2365,5312.5 2380.54,5328.04 R18.2@2440,5328.04 R17.2@2550,5328.04 R19.2@2665,5328.04 R20.2@2780,5328.04 2869.46,5328.04 ; 3019.22,4773.15 3040.79,4794.72 ; 3019.22,4773.15 3026.44,4773.15 3040.79,4787.5 3040.79,4794.72
  Bottom Layer w10: RJ1.2@2289.87,4765.1 2993.62,4765.1 v1(3001.67,4773.15) ; v1(3042,5844) 3175,5844 3193,5862 3193,5917 3484,6208 4797.15,6208 4809.15,6196 5225,6196 5288.5,6132.5 5364.09,6132.5 5374.59,6143 5374.59,6193.09 5402.5,6221 6583.5,6221 6592,6229.5 6659.5,6229.5 6808,6081 7854,6081 H1_PWR.3@7900,6035 ; H2_PWR.1@7895,5760 7961,5694 v1(8720,5694)
3V3_MAIN_LED_1: 3V3_MAIN_LED.1 R4.1 | length 112.4
  Top Layer w10: R4.1@9290,5835.63 9342,5835.63 9347.87,5841.5 3V3_MAIN_LED.1@9400,5841.5
4G_D+: U10.4 USB_4G.3 | length 846.6
  Top Layer w10: USB_4G.3@1720,6520.99 1720,6070.24 U10.4@1999.92,5790.32
4G_D-: U10.5 USB_4G.2 | length 736
  Top Layer w10: USB_4G.2@1745.6,6520.99 1745.6,6144.64 U10.5@1999.92,5890.32
4G_RST: U1.93 U10.14 | length 2398
  Top Layer w10: v1(5348,6162.31) 5365.79,6144.52 U1.93@5365.79,6040.2
  Bottom Layer w10: U10.14@3149.92,6290.32 3216.24,6224 4105,6224 4126,6245 5244,6245 5326.69,6162.31 v1(5348,6162.31)
4G_RXD: U10.12 UART_JUMPER_4G.2 | length 137.3
  Bottom Layer w10: U10.12@3149.92,6490.32 3214,6490.32 3219.32,6485 UART_JUMPER_4G.2@3285,6485
4G_TXD: U10.13 UART_JUMPER_4G.4 | length 137.3
  Bottom Layer w10: U10.13@3149.92,6390.32 3214,6390.32 3219.32,6385 UART_JUMPER_4G.4@3285,6385
4G_VBUS: U10.6 USB_4G.1 | length 625.4
  Top Layer w10: USB_4G.1@1771.2,6520.99 1771.2,6219.04 U10.6@1999.92,5990.32
+5V: +1V.1 C17.1 C18.2 C22.1 C24.2 C25.2 C27.1 C76.1 C77.2 H4_PWR.1 H4_PWR.3 H4_PWR.5 R33.2 U2.3 U3.3 U4.3 U7.4 U10.22 USB_SERIAL.1 | length 14040.1
  Top Layer w10: v1(3751.2,6258) v1(3751.2,6333) USB_SERIAL.1@3751.2,6515.99 ; +1V.1@7370,5180 7291,5259 7291,6270 7254.67,6306.33 7254.67,6458.67 7470,6674 7736,6674 H4_PWR.1@7900,6510 ; H4_PWR.5@7900,6310 H4_PWR.3@7900,6410 H4_PWR.1@7900,6510 ; R33.2@8440,6579.37 8290,6579.37 C77.2@8249.37,6620 8249.37,6563.02 8251.39,6561 C76.1@8251.39,6505 ; C25.2@8500,5524.37 8437.02,5524.37 C27.1@8400,5561.39 8400,5671 8363,5708 8363,5867 8400,5904 C22.1@8400,5951.39 ; C18.2@8500,6324.37 8458.02,6324.37 8441,6341.39 C17.1@8400,6341.39 ; U4.3@8810.55,5368 8810.55,5373 9407.5,5373 9422,5387.5 9422,5650 9405,5667 8825,5667 8810.55,5681.45 U3.3@8810.55,5768 8810.55,5863.55 8827,5880 9332,5881 9332,6002 9237,6097 8825,6097 8810.55,6112.5 ; U2.3@8810.55,6168 8810.55,6112.5 ; H4_PWR.1@7900,6510 7936,6546 8164,6546 8205,6505 C76.1@8251.39,6505 ; C76.1@8251.39,6505 8251.39,6438.04 8253.43,6436 U7.4@8253.43,6370.99 8283.02,6341.39 C17.1@8400,6341.39 ; C22.1@8400,5951.39 8427.02,5924.37 C24.2@8500,5924.37 8500,6066.5 8546,6112.5 8810.55,6112.5 ; C22.1@8400,5951.39 8400,6062 8363,6099 8363,6256 8400,6293 C17.1@8400,6341.39
  Bottom Layer w10: U10.22@3149.92,5490.32 3019,5621.24 3019,6314.5 3037.5,6333 v1(3751.2,6333) ; v1(3751.2,6258) 3769.2,6240 4024,6240 4053.75,6269.75 5266.04,6269.75 5287.3,6291 7416,6291 7482,6357 7853,6357 H4_PWR.5@7900,6310
AGND: R39.2 U11.25 | length 252.3
  Top Layer w10: U11.25@5930.48,2696.56 5934.97,2696.56 6010.41,2772 6100,2772 6113.1,2785.1 R39.2@6113.1,2818.1
BEEP: R32.2 U1.34 | length 1975.6
  Top Layer w10: R32.2@5299.37,3815 5299.37,3870 5301,3871.63 v1(5301,4586) ; U1.34@5720.12,5189.8 5720.12,5096.88 v1(5723,5094)
  Bottom Layer w10: v1(5301,4586) 5239,4648 5239,4912.5 5256.5,4930 5763,4930 5783,4950 5783,5079 5782,5080 5737,5080 v1(5723,5094)
BOOT0: BOOT0.1 C47.1 R24.2 U1.138 | length 2916.9
  Top Layer w10: v1(4095,5272) 4095,4129 4375,3849 R24.2@4375,3613.04 4421,3613.04 4422.33,3614.37 C47.1@4470,3614.37 4503.74,3614.37 BOOT0.1@4552.95,3663.58 ; v1(4875,5334) 4929.62,5388.62 U1.138@4989.81,5388.62
  Bottom Layer w10: v1(4095,5272) 4157,5334 v1(4875,5334)
BOOT1: BOOT1.1 C48.1 R25.2 U1.48 | length 3334.1
  Top Layer w10: v1(4158,5366) 4158,4822 4370,4610 R25.2@4370,4128.04 4416,4128.04 4417.33,4129.37 C48.1@4465,4129.37 4498.74,4129.37 BOOT1.1@4547.95,4178.58 ; v1(5699,5503) 5786.55,5503 5802.5,5487.05 U1.48@5840.2,5487.05
  Bottom Layer w10: v1(4158,5366) 4158,5445 4159,5446 5672,5446 5699,5473 v1(5699,5503)
BUZZER_2: BUZZER.2 D1.2 Q1.3 | length 262.7
  Top Layer w10: Q1.3@5105,3641.64 5171.64,3575 BUZZER.2@5203.43,3575 5203.43,3512.26 D1.2@5151.17,3460
C30_2: C30.2 U5.8 | length 385.3
  Top Layer w10: 3428.86,5684.13 3428,5683.27 3428,5636.37 C30.2@3459.37,5605 3459.37,5668.24 3523,5731.87 3523,5795.5 3537.5,5810 U5.8@3593,5810
C31_2: C31.2 U5.7 X2.3 | length 333.8
  Top Layer w10: C31.2@3380.63,5915 3380.63,5859.87 3388.5,5852 3388.5,5837.5 ; X2.3@3388.5,5798.31 3388.5,5837.5 ; U5.7@3593,5860 3411,5860 3388.5,5837.5
C35_2: C35.2 U9.4 X1.3 | length 408.7
  Top Layer w10: C35.2@2969.37,4575 3005,4575 3013,4567 ; X1.3@3051.7,4565.54 3014.46,4565.54 3013,4567 ; U9.4@3099.84,4824.9 3099.84,4789.1 3102.79,4786.16 3102.79,4714.21 3058.58,4670 3014,4670 3013,4669 3013,4567
C36_2: C36.2 U9.5 X1.1 | length 305.2
  Top Layer w10: U9.5@3119.53,4824.9 3119.53,4738.78 3138.31,4720 X1.1@3138.31,4634.44 3149,4634.44 3208.44,4575 C36.2@3220.63,4575
C41_2: C40.2 C41.2 U9.6 | length 291.4
  Top Layer w10: U9.6@3139.21,4824.9 3139.21,4775 3154.21,4760 C40.2@3294.45,4760 C41.2@3294.45,4680
C51_2: C51.2 C52.2 U11.17 | length 283.1
  Top Layer w10: U11.17@5944.4,2557.36 5955.1,2546.67 6000,2546.67 6072.16,2474.5 C51.2@6072.16,2442.84 6073,2442.84 6133.83,2503.67 C52.2@6136.33,2503.67
C53_2: C53.2 C54.2 U11.5 | length 266.2
  Top Layer w10: C54.2@5563.67,2386.33 5563.67,2387 5623,2446.33 C53.2@5623.67,2446.33 5671.33,2446.33 5739,2514 5739,2536 5743,2540 5749.52,2540 U11.5@5749.52,2543.44
C55_2: C55.2 C56.2 U11.24 | length 335.2
  Top Layer w10: U11.24@5944.4,2682.64 5948.88,2682.64 6012.24,2746 6155.16,2746 6165.49,2756.33 C56.2@6166.33,2756.33 6168,2756.33 6223,2701.33 C55.2@6226.33,2701.33
CF1_7878: HEADER_7878.3 U1.75 U11.33 | length 6593.3
  Top Layer w10: U1.75@5720.12,6040.2 5720.12,6103 5749.62,6132.5 6061.5,6132.5 6171.5,6022.5 6171.5,5748.5 6191,5729 6191,4223 6619,3795 7325,3795 7340,3810 7340,3905 HEADER_7878.3@7295,3950 ; U11.33@5791.28,2738.31 5746,2783.59 5746,3706 5818,3778 v1(5818,3925)
  Bottom Layer w10: v1(5818,3925) 5843,3950 HEADER_7878.3@7295,3950
CF2_7878: HEADER_7878.4 U1.76 U11.34 | length 6288.6
  Top Layer w10: U1.76@5700.44,6040.2 5700.44,6111.94 5737,6148.5 6073.5,6148.5 6187.5,6034.5 6187.5,5764.5 6207,5745 6207,4379 6465,4121 7024,4121 HEADER_7878.4@7295,3850 ; v1(5753,3850) 5730,3827 5730,2774 5777.36,2726.64 U11.34@5777.36,2724.4
  Bottom Layer w10: v1(5753,3850) HEADER_7878.4@7295,3850
CF3_7878: HEADER_7878.5 U1.91 U11.35 | length 7020.3
  Top Layer w10: U1.91@5405.16,6040.2 5405.16,6198.16 v1(5452.5,6245.5) ; v1(5701,3296) 5701,2772.92 U11.35@5763.44,2710.47 ; v1(7104,6180) 7202,6082 7202,4353 7143,4294 7143,4053 7193,4003 7340.5,4003 7356,3987.5 7356,3762.5 7343.5,3750 HEADER_7878.5@7295,3750
  Bottom Layer w10: v1(5452.5,6245.5) 7038.5,6245.5 v1(7104,6180) ; v1(5701,3296) 5828,3423 6144,3423 6471,3750 HEADER_7878.5@7295,3750
CLKIN_7878: U11.27 X3.3 | length 138.8
  Top Layer w10: U11.27@5902.64,2724.4 5993.04,2814.8 X3.3@5993.04,2825.71
D+: U5.5 USB_SERIAL.3 | length 655.7
  Top Layer w10: U5.5@3593,5960 3687.5,5960 3700,5972.5 USB_SERIAL.3@3700,6515.99
D-: U5.6 USB_SERIAL.2 | length 1073.6
  Top Layer w10: U5.6@3593,5910 3547,5910 3546,5911 3546,5982 3547,5983 3649,5983 3679,6013 3679,6290 3596,6373 3596,6587.5 3612.5,6604 3684.6,6604 3725.6,6563 USB_SERIAL.2@3725.6,6515.99
ETH_MDC: U1.27 U9.13 | length 2665.1
  Top Layer w10: U9.13@3139.21,4975.1 3139.21,5015.21 v1(3271,5147) ; v1(5580.5,5268) 5582.33,5266.17 U1.27@5582.33,5189.8
  Bottom Layer w10: v1(3271,5147) 3291.88,5167.88 5480.38,5167.88 v1(5580.5,5268)
ETH_MDIO: R15.1 U1.36 | length 2611.2
  Top Layer w10: R15.1@3373.04,5025 3373.04,4987 3396.04,4964 v1(3425,4964) ; v1(5759.49,5051.5) U1.36@5759.49,5189.8
  Bottom Layer w10: v1(3425,4964) 3428.24,4960.76 5668.75,4960.76 v1(5759.49,5051.5)
ETH_RESET: U1.20 U9.15 | length 2611.2
  Top Layer w10: U9.15@3099.84,4975.1 3099.84,5154.84 v1(3116,5171) ; v1(5437.06,5244) 5444.53,5236.53 U1.20@5444.53,5189.8
  Bottom Layer w10: v1(3116,5171) 3189,5244 v1(5437.06,5244)
FLASH_CS: U1.40 U6.1 | length 975.8
  Top Layer w10: U1.40@5840.2,5329.57 5952.57,5329.57 v1(5956,5333) ; U6.1@6310,4621.02 v1(6310,4739.03)
  Bottom Layer w10: v1(5956,5333) 5956,5310.37 6310,4956.37 v1(6310,4739.03)
FLASH_MISO: U1.42 U6.2 | length 1161.5
  Top Layer w10: U1.42@5840.2,5368.94 5911.94,5368.94 5938.5,5395.5 v1(5978,5395.5) ; v1(6286,5224) 6286,4800 6360,4726 U6.2@6360,4621.02
  Bottom Layer w10: v1(5978,5395.5) 5984,5389.5 6120.5,5389.5 v1(6286,5224)
FLASH_MOSI: U1.135 U6.5 | length 1809.8
  Top Layer w10: U1.135@4989.81,5447.68 5037.5,5447.68 5050,5435.18 v1(5050,5385) ; U6.5@6460,4898.98 v1(6460,5008)
  Bottom Layer w10: v1(5050,5385) 5858.34,5385 5870.84,5372.5 5998,5372.5 5999,5371.5 5999,5339 6255,5083 6385,5083 v1(6460,5008)
FLASH_SCK: U1.41 U6.6 | length 883.2
  Top Layer w10: U1.41@5840.2,5349.25 5930.07,5349.25 5941.82,5361 v1(6022,5361) ; U6.6@6410,4898.98 v1(6410,5099)
  Bottom Layer w10: v1(6022,5361) 6284,5099 v1(6410,5099)
FSMC_A0: U1.10 U8.5 | length 3274.3
  Top Layer w10: U1.10@5247.68,5189.8 5247.68,4912.32 v1(5262,4898) ; v1(6553,4651) 7011,5109 7011,5630.72 6864.72,5777 U8.5@6864.72,5872.66
  Bottom Layer w10: v1(5262,4898) 6130.53,4898 6161,4867.53 6161,4677.5 6187.5,4651 v1(6553,4651)
FSMC_A1: U1.11 U8.4 | length 3331.9
  Top Layer w10: U1.11@5267.36,5189.8 5267.36,5058.64 v1(5298,5028) ; v1(6752,4676) 7027,4951 7027,5676.22 6896.22,5807 U8.4@6896.22,5872.66
  Bottom Layer w10: v1(5298,5028) 5322,5004 5599.5,5004 5712.5,5117 6023.32,5117 6177,4963.32 6177,4793.9 6294.9,4676 v1(6752,4676)
FSMC_A2: U1.12 U8.3 | length 3339.5
  Top Layer w10: U1.12@5287.05,5189.8 5287.05,5086.95 v1(5323,5051) ; v1(6810,4680) 7043,4913 7043,5713.72 6927.72,5829 U8.3@6927.72,5872.66
  Bottom Layer w10: v1(5323,5051) 5349,5025 5576,5025 5684,5133 6073,5133 6197.28,5008.72 6197.28,4806 6302.28,4701 6789,4701 v1(6810,4680)
FSMC_A3: U1.13 U8.2 | length 2623.1
  Top Layer w10: U1.13@5306.73,5189.8 5306.73,5463.12 5444,5600.38 v1(5444,5871) ; v1(6959,6055) 6959.21,6054.79 U8.2@6959.21,5872.66
  Bottom Layer w10: v1(5444,5871) 5536,5963 5600.37,5963 5601.37,5964 5601.37,6028.37 5702.68,6129.68 6494.68,6129.68 6509,6144 6721.21,6144 6810.21,6055 v1(6959,6055)
FSMC_A4: U1.14 U8.1 | length 2723.6
  Top Layer w10: U1.14@5326.42,5189.8 5326.42,5291 5387,5351.58 v1(5387,5489) ; U8.1@6990.71,5872.66 6990.71,5872 7066,5872 7179,5759 v1(7179,5486)
  Bottom Layer w10: v1(5387,5489) 5449,5551 5738.5,5551 5739.5,5550 5739.5,5522.5 5795.5,5466.5 6956.98,5466.5 6973.48,5450 7000.71,5450 7036.71,5486 v1(7179,5486)
FSMC_A5: U1.15 U8.24 | length 1756.9
  Top Layer w10: v1(5346.1,5073) U1.15@5346.1,5189.8 ; v1(6360,5060) 6360.79,5060.79 U8.24@6360.79,5427.34
  Bottom Layer w10: v1(5346.1,5073) 5543,5073 5826,5356 5982,5356 5983,5355 5983,5323 6246,5060 v1(6360,5060)
FSMC_A6: U1.50 U8.23 | length 698.8
  Top Layer w10: v1(5776.31,5526.42) U1.50@5840.2,5526.42 ; v1(6312,5497.5) 6329.29,5480.21 U8.23@6329.29,5427.34
  Bottom Layer w10: v1(5776.31,5526.42) 5817.22,5485.5 6300,5485.5 v1(6312,5497.5)
FSMC_A7: U1.53 U8.18 | length 1022.2
  Top Layer w10: U1.53@5840.2,5585.47 5887.53,5585.47 5891,5582 5950,5582 v1(5982,5614) ; v1(6430.28,5691.96) 6455.28,5716.96 U8.18@6455.28,5872.66
  Bottom Layer w10: v1(5982,5614) 5949.5,5581.5 5919.5,5581.5 5916.66,5584.34 5916.66,5646.56 5939.14,5669.04 6106,5669.04 6124.96,5688 6426.32,5688 v1(6430.28,5691.96)
FSMC_A8: U1.54 U8.19 | length 843.3
  Top Layer w10: U1.54@5840.2,5605.16 v1(5940,5605.16) ; v1(6423.78,5659.5) 6407.28,5676 6407.28,5714.96 6423.78,5731.46 U8.19@6423.78,5872.66
  Bottom Layer w10: v1(5940,5605.16) 5984.34,5649.5 6110.5,5649.5 6133,5672 6411.28,5672 v1(6423.78,5659.5)
FSMC_A9: U1.55 U8.20 | length 785.2
  Top Layer w10: U1.55@5840.2,5624.84 5907.61,5624.84 5913,5630.23 5944.23,5630.23 5963,5649 v1(6146.5,5649) ; v1(6391.28,5649) 6391.28,5729.95 6392.28,5730.96 U8.20@6392.28,5872.66
  Bottom Layer w10: v1(6146.5,5649) v1(6391.28,5649)
FSMC_A10: U1.56 U8.21 | length 822.5
  Top Layer w10: U1.56@5840.2,5644.53 5894.8,5644.53 5896.5,5646.23 5912.46,5646.23 5944.23,5678 6098.5,5678 6127.5,5707 v1(6127.5,5931.5) ; U8.21@6360.79,5872.66 v1(6360.79,5919)
  Bottom Layer w10: v1(6127.5,5931.5) 6348.29,5931.5 v1(6360.79,5919)
FSMC_A11: U1.57 U8.22 | length 691.4
  Top Layer w10: U1.57@5840.2,5664.21 5898.44,5664.21 5928.23,5694 6015,5694 v1(6048,5727) ; U8.22@6329.29,5872.66 6329.29,5848 6359.25,5818.04 v1(6359.25,5746.96)
  Bottom Layer w10: v1(6048,5727) 6050.5,5727 6070.46,5746.96 v1(6359.25,5746.96)
FSMC_A12: U1.87 U8.28 | length 2770.6
  Top Layer w10: U1.87@5483.9,6040.2 5483.9,6089.9 5514.57,6120.57 5673.51,6120.57 5717.44,6164.5 6080.13,6164.5 6210.5,6034.13 6210.5,5773.5 6223,5761 6223,5333 6309,5247 6309,5019 6384,4944 6384,4859 6400,4843 6435,4844 6435,5174 6486.77,5225.77 U8.28@6486.77,5427.34
FSMC_A13: U1.88 U8.27 | length 2413
  Top Layer w10: U1.88@5464.22,6040.2 5464.22,6093 5511.75,6140.53 5661.34,6140.53 5701.31,6180.5 6088.16,6180.5 6226.5,6042.16 6226.5,5789.5 6249.69,5766.31 6249.69,5448.31 6336,5362 6336,5051 6350,5037 6374,5037 6387,5050 6387,5170 6455.28,5238.28 U8.27@6455.28,5427.34
FSMC_A14: U1.89 U8.26 | length 1760.2
  Top Layer w10: U1.89@5444.53,6040.2 5444.53,6114.68 5495.85,6166 5660,6166 5742,6248 6134.5,6248 6258.5,6124 6258.5,5820.29 6292.88,5785.91 6292.88,5607.62 6423.78,5476.72 U8.26@6423.78,5427.34
FSMC_A15: U1.90 U8.25 | length 1682.8
  Top Layer w10: U1.90@5424.85,6040.2 5424.85,6128.5 v1(5437.35,6141) ; v1(6145,6178.5) 6242.5,6081 6242.5,5805.5 6276.88,5771.12 6276.88,5596.12 6392.28,5480.72 U8.25@6392.28,5427.34
  Bottom Layer w10: v1(5437.35,6141) 5509,6141 5546.5,6178.5 v1(6145,6178.5)
FSMC_A16: U1.80 U8.42 | length 2109.6
  Top Layer w10: v1(5614,5918.97) 5621.7,5926.66 U1.80@5621.7,6040.2 ; v1(6824,5795) 6961,5658 6961,5538.93 6927.72,5505.65 U8.42@6927.72,5427.34
  Bottom Layer w10: v1(5614,5918.97) 5620.97,5925.93 5620.97,5968.97 5683.55,6031.55 5848.55,6031.55 5877,6060 6454.51,6060 6460.92,6053.59 6594,6053.59 6652.41,6112 6669.49,6112 6762,6019.49 6762,5985.92 6824,5923.92 v1(6824,5795)
FSMC_A17: U1.81 U8.43 | length 1959
  Top Layer w10: U1.81@5602.01,6040.2 5602.01,5953.01 5590,5941 5590,5666.5 v1(5655.47,5601.03) ; U8.43@6959.21,5427.34 6959.21,5477.21 v1(6988,5506)
  Bottom Layer w10: v1(5655.47,5601.03) 5766.22,5601.03 5849.76,5517.5 6065.5,5517.5 6096,5548 6715,5548 6755,5508 6986,5508 v1(6988,5506)
FSMC_A18: U1.82 U8.44 | length 3984.6
  Top Layer w10: v1(5578,5986) 5582.33,5990.33 U1.82@5582.33,6040.2 ; v1(6610,6201.5) 6754,6345.5 6754,6662.5 6770.5,6679 6921,6679 7238.67,6361.33 7238.67,5462.33 v1(7240,5461) ; v1(6988,5473) 6990.71,5470.29 U8.44@6990.71,5427.34
  Bottom Layer w10: v1(5578,5986) 5551,6013 5425,6013 5406.59,6031.41 5406.59,6161.36 5420.11,6174.89 5452.5,6174.89 5464.89,6162.5 5485.95,6162.5 5524.95,6201.5 v1(6610,6201.5) ; v1(6988,5473) 7024,5509 7192,5509 v1(7240,5461)
FSMC_D0: U1.85 U8.7 | length 1669.7
  Top Layer w10: U1.85@5523.27,6040.2 5523.27,6083.27 v1(5537,6097) ; v1(6637,6184) 6775,6184 6814.75,6144.25 6814.75,5955.01 6801.73,5942 U8.7@6801.73,5872.66
  Bottom Layer w10: v1(5537,6097) 5592,6152 6482.5,6152 6490.5,6160 6613,6160 v1(6637,6184)
FSMC_D1: U1.86 U8.8 | length 1762.3
  Top Layer w10: v1(5484,5982) 5503.59,6001.59 U1.86@5503.59,6040.2 ; v1(6739,5986.5) 6739,5945.24 6770.24,5914 U8.8@6770.24,5872.66
  Bottom Layer w10: v1(5484,5982) 5484,5962.5 5421,5899.5 5421,5849 5422,5848 5606,5848 5725,5967 5848,5967 5891,6010 6032,6010 6040.5,6018.5 6153,6018.5 6162.5,6028 6422.51,6028 6428.92,6021.59 6703.91,6021.59 v1(6739,5986.5)
FSMC_D2: U1.114 U8.9 | length 2134.7
  Top Layer w10: U1.114@4989.81,5861.06 v1(5078.95,5861.06) ; v1(6738,5683) 6738,5768 6738.74,5768.74 U8.9@6738.74,5872.66
  Bottom Layer w10: v1(5078.95,5861.06) 5078.95,5737.5 5096.52,5719.93 6003,5719.93 6021.89,5701.04 6056.54,5701.04 6075.5,5720 6321.28,5720 6325.24,5723.96 6369.75,5723.96 6389.7,5743.91 6455.65,5743.91 6534.56,5665 6712,5665 6730,5683 v1(6738,5683)
FSMC_D3: U1.115 U8.10 | length 2623.9
  Top Layer w10: v1(4861.5,5853.5) 4861.5,5846 4862.81,5844.69 4950.21,5844.69 4953.52,5841.38 U1.115@4989.81,5841.38 ; v1(6678,5524) 6678,5610.76 6707.24,5640 U8.10@6707.24,5872.66
  Bottom Layer w10: v1(4861.5,5853.5) 4861.5,5790.37 4874,5777.87 4874,5578.5 4885.5,5567 5774,5567 5839.5,5501.5 6072.5,5501.5 6095,5524 v1(6678,5524)
FSMC_D4: U1.58 U8.13 | length 1667
  Top Layer w10: v1(5701.5,5980) 5701.5,5687.5 5705.1,5683.9 U1.58@5840.2,5683.9 ; U8.13@6612.76,5872.66 6612.76,5933 6659,5979.24 v1(6659,6082.5)
  Bottom Layer w10: v1(5701.5,5980) 5736.5,6015 5864,6015 5875,6026 6016,6026 6024.5,6034.5 6137,6034.5 6146.5,6044 6438.51,6044 6444.92,6037.59 6614.09,6037.59 v1(6659,6082.5)
FSMC_D5: U1.59 U8.14 | length 1496.1
  Top Layer w10: v1(5820,6076) 5820,6030.17 5717.5,5927.67 5717.5,5736.08 5750,5703.58 U1.59@5840.2,5703.58 ; v1(6556.22,6095.54) 6581.26,6070.5 U8.14@6581.26,5872.66
  Bottom Layer w10: v1(5820,6076) 5836,6092 6552.67,6092 v1(6556.22,6095.54)
FSMC_D6: U1.60 U8.15 | length 1010.7
  Top Layer w10: U1.60@5840.2,5723.27 5896,5723.27 5897,5722.27 v1(5897,5696) ; v1(6475,5642) 6549.76,5716.76 U8.15@6549.76,5872.66
  Bottom Layer w10: v1(5897,5696) 5907.96,5685.04 6072.54,5685.04 6091.5,5704 6334.54,5704 6338.5,5707.96 6385.75,5707.96 6405.7,5727.91 6439.8,5727.91 6455.21,5712.5 6455.21,5661.79 v1(6475,5642)